# EAGLE board Thermistor-Connector-panel10x6 (EAGLE 6.6.0)
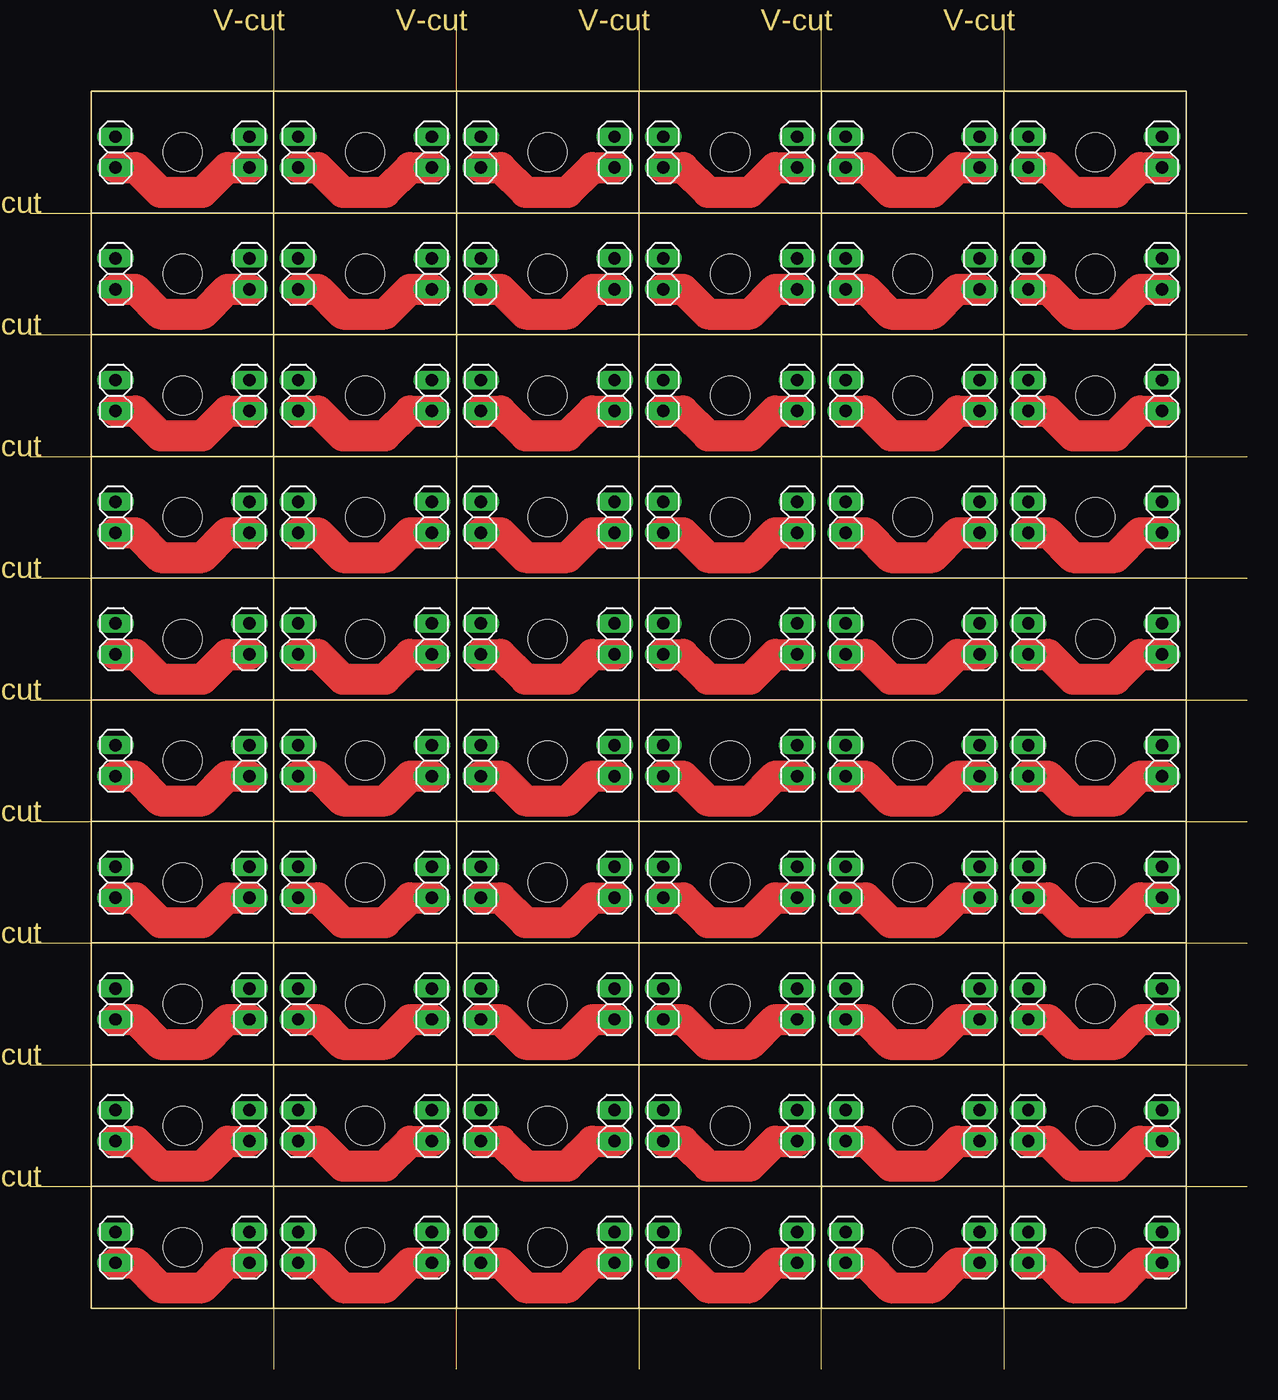
[diagram p0: board, top side]
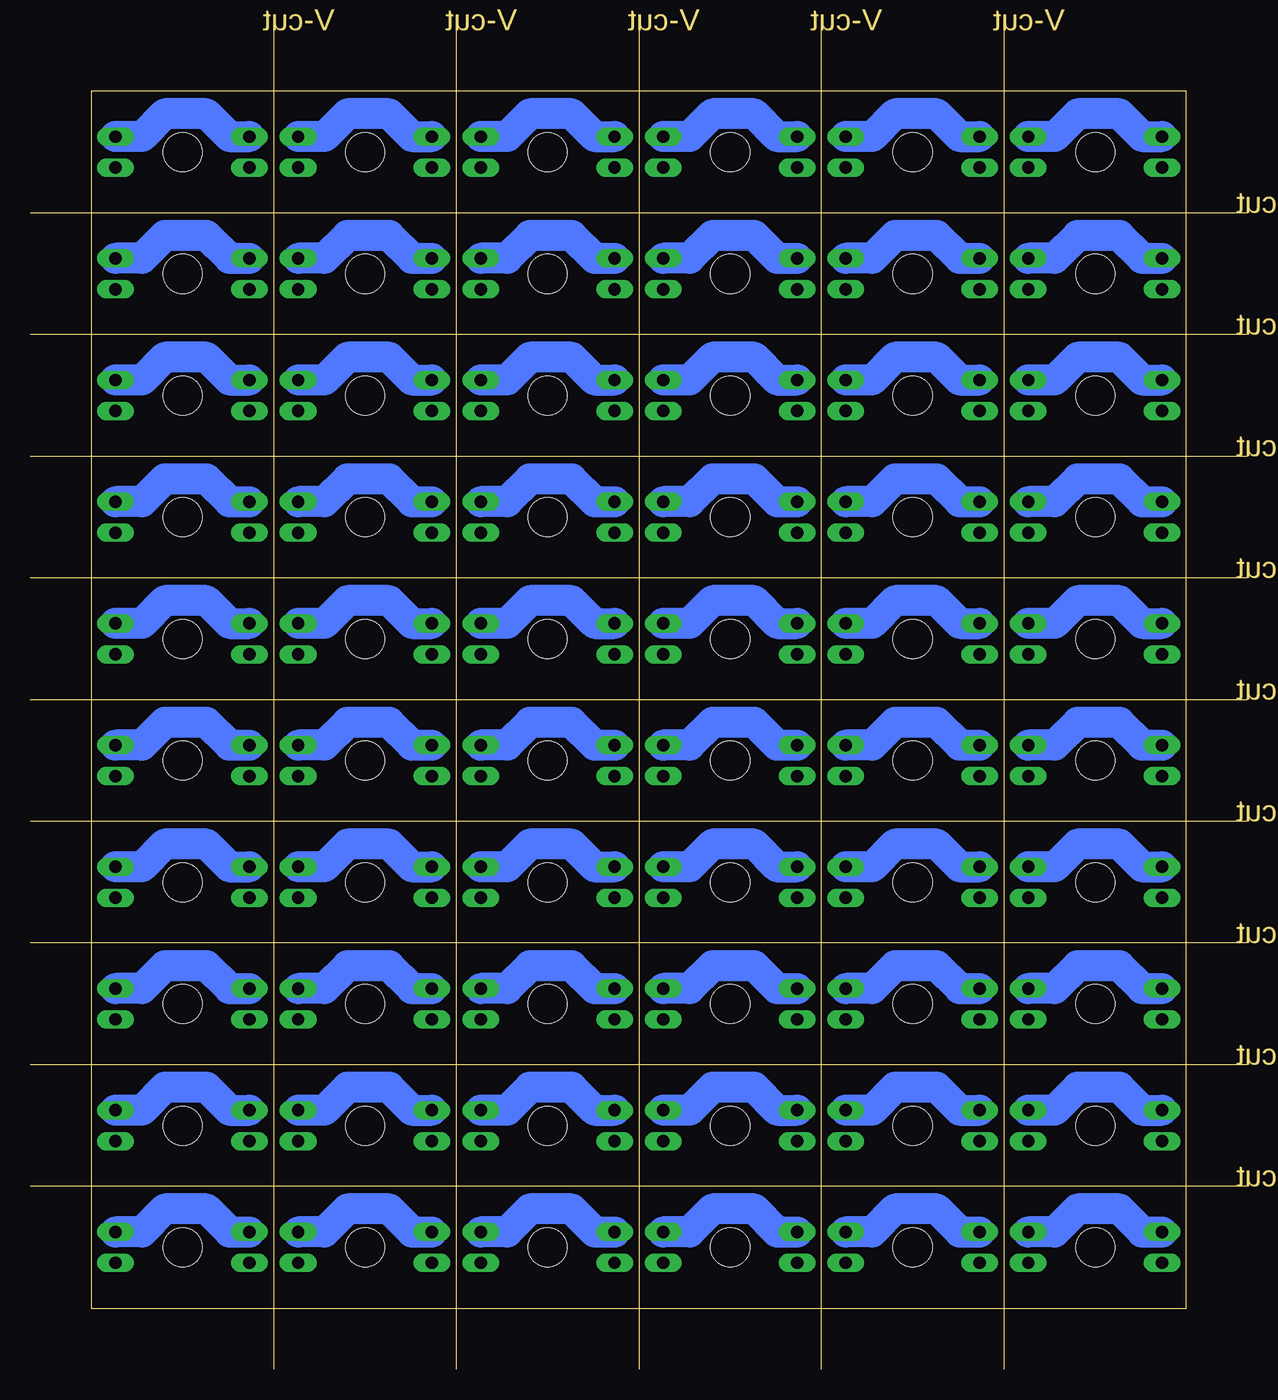
[diagram p1: board, bottom side, seen from below]

Size 100 x 110 mm. Coordinates in mm from the lower left corner, seen from the top.
Outline: 20,110 20,0
Outline: 35,0 35,110
Outline: 50,110 50,0
Outline: 65,0 65,110
Outline: 80,110 80,0
Outline: 0,15 100,15
Outline: 0,25 100,25
Outline: 0,35 100,35
Outline: 0,45 100,45
Outline: 0,55 100,55
Outline: 0,65 100,65
Outline: 0,75 100,75
Outline: 0,85 100,85
Outline: 0,95 100,95
Outline: 5,105 95,105 95,5 5,5 5,105
Copper layers (1*16): Top 0.035mm / dielectric 1.5mm / Bottom 0.035mm
Design rules "SeeedStudio_2layer_DRU_no_angle_20140221": minimum track width 6mil, minimum drill 12mil, track to track 6mil, track to pad 6mil, pad to pad 6mil, via to via 6mil, smd to smd 0mil, copper to edge 10mil, drill to drill 10mil, minimum pad ring 10mil, minimum via ring 6mil, stop-mask expansion 2mil, vias tented up to drill 100mil, thermal gap 10mil
Holes 3.2 mm at 12.5,10 12.5,20 12.5,30 12.5,40 12.5,50 12.5,60 12.5,70 12.5,80 12.5,90 12.5,100 27.5,10 27.5,20 27.5,30 27.5,40 27.5,50 27.5,70 27.5,60 27.5,80 27.5,90 27.5,100 42.5,100 57.5,100 72.5,100 87.5,100 87.5,90 72.5,90 57.5,90 42.5,90 42.5,80 57.5,80 72.5,80 87.5,80 87.5,70 72.5,70 57.5,70 42.5,70 42.5,60 57.5,60 72.5,60 87.5,60 87.5,50 72.5,50 57.5,50 42.5,50 42.5,40 57.5,40 72.5,40 87.5,40 87.5,30 72.5,30 57.5,30 42.5,30 42.5,20 57.5,20 72.5,20 87.5,20 87.5,10 72.5,10 57.5,10 42.5,10
tKeepout: area 10,7.5 to 15,12.5; area 10,17.5 to 15,22.5; area 10,27.5 to 15,32.5; area 10,37.5 to 15,42.5; area 10,47.5 to 15,52.5; area 10,57.5 to 15,62.5; area 10,67.5 to 15,72.5; area 10,77.5 to 15,82.5; area 10,87.5 to 15,92.5; area 10,97.5 to 15,102.5; area 25,7.5 to 30,12.5; area 25,17.5 to 30,22.5; 48 more areas

## Footprints (pad centres in the part's own frame; a part is rotated, then mirrored left to right if it is on the bottom)
1X02 = drill 1.016 long: 1 -1.27,0; 2 1.27,0

## Placement (x,y rotation side)
JP1  [1X02]  18,10 90 top
JP2  [1X02]  7,10 90 top
JP3  [1X02]  18,20 90 top
JP4  [1X02]  7,20 90 top
JP5  [1X02]  18,30 90 top
JP6  [1X02]  7,30 90 top
JP7  [1X02]  18,40 90 top
JP8  [1X02]  7,40 90 top
JP9  [1X02]  18,50 90 top
JP10  [1X02]  7,50 90 top
JP11  [1X02]  18,60 90 top
JP12  [1X02]  7,60 90 top
JP13  [1X02]  18,70 90 top
JP14  [1X02]  7,70 90 top
JP15  [1X02]  18,80 90 top
JP16  [1X02]  7,80 90 top
JP17  [1X02]  18,90 90 top
JP18  [1X02]  7,90 90 top
JP19  [1X02]  18,100 90 top
JP20  [1X02]  7,100 90 top
JP21  [1X02]  33,10 90 top
JP22  [1X02]  22,10 90 top
JP23  [1X02]  33,20 90 top
JP24  [1X02]  22,20 90 top
JP25  [1X02]  33,30 90 top
JP26  [1X02]  22,30 90 top
JP27  [1X02]  33,40 90 top
JP28  [1X02]  22,40 90 top
JP29  [1X02]  33,50 90 top
JP30  [1X02]  22,50 90 top
JP31  [1X02]  33,60 90 top
JP32  [1X02]  22,60 90 top
JP33  [1X02]  33,70 90 top
JP34  [1X02]  22,70 90 top
JP35  [1X02]  33,80 90 top
JP36  [1X02]  22,80 90 top
JP37  [1X02]  33,90 90 top
JP38  [1X02]  22,90 90 top
JP39  [1X02]  33,100 90 top
JP40  [1X02]  22,100 90 top
JP41  [1X02]  48,10 90 top
JP42  [1X02]  37,10 90 top
JP43  [1X02]  48,20 90 top
JP44  [1X02]  37,20 90 top
JP45  [1X02]  48,30 90 top
JP46  [1X02]  37,30 90 top
JP47  [1X02]  48,40 90 top
JP48  [1X02]  37,40 90 top
JP49  [1X02]  48,50 90 top
JP50  [1X02]  37,50 90 top
JP51  [1X02]  48,60 90 top
JP52  [1X02]  37,60 90 top
JP53  [1X02]  48,70 90 top
JP54  [1X02]  37,70 90 top
JP55  [1X02]  48,80 90 top
JP56  [1X02]  37,80 90 top
JP57  [1X02]  48,90 90 top
JP58  [1X02]  37,90 90 top
JP59  [1X02]  48,100 90 top
JP60  [1X02]  37,100 90 top
JP61  [1X02]  63,10 90 top
JP62  [1X02]  52,10 90 top
JP63  [1X02]  63,20 90 top
JP64  [1X02]  52,20 90 top
JP65  [1X02]  63,30 90 top
JP66  [1X02]  52,30 90 top
JP67  [1X02]  63,40 90 top
JP68  [1X02]  52,40 90 top
JP69  [1X02]  63,50 90 top
JP70  [1X02]  52,50 90 top
JP71  [1X02]  63,60 90 top
JP72  [1X02]  52,60 90 top
JP73  [1X02]  63,70 90 top
JP74  [1X02]  52,70 90 top
JP75  [1X02]  63,80 90 top
JP76  [1X02]  52,80 90 top
JP77  [1X02]  63,90 90 top
JP78  [1X02]  52,90 90 top
JP79  [1X02]  63,100 90 top
JP80  [1X02]  52,100 90 top
JP81  [1X02]  78,10 90 top
JP82  [1X02]  67,10 90 top
JP83  [1X02]  78,20 90 top
JP84  [1X02]  67,20 90 top
JP85  [1X02]  78,30 90 top
JP86  [1X02]  67,30 90 top
JP87  [1X02]  78,40 90 top
JP88  [1X02]  67,40 90 top
JP89  [1X02]  78,50 90 top
JP90  [1X02]  67,50 90 top
JP91  [1X02]  78,60 90 top
JP92  [1X02]  67,60 90 top
JP93  [1X02]  78,70 90 top
JP94  [1X02]  67,70 90 top
JP95  [1X02]  78,80 90 top
JP96  [1X02]  67,80 90 top
JP97  [1X02]  78,90 90 top
JP98  [1X02]  67,90 90 top
JP99  [1X02]  78,100 90 top
JP100  [1X02]  67,100 90 top
JP101  [1X02]  93,10 90 top
JP102  [1X02]  82,10 90 top
JP103  [1X02]  93,20 90 top
JP104  [1X02]  82,20 90 top
JP105  [1X02]  93,30 90 top
JP106  [1X02]  82,30 90 top
JP107  [1X02]  93,40 90 top
JP108  [1X02]  82,40 90 top
JP109  [1X02]  93,50 90 top
JP110  [1X02]  82,50 90 top
JP111  [1X02]  93,60 90 top
JP112  [1X02]  82,60 90 top
JP113  [1X02]  93,70 90 top
JP114  [1X02]  82,70 90 top
JP115  [1X02]  93,80 90 top
JP116  [1X02]  82,80 90 top
JP117  [1X02]  93,90 90 top
JP118  [1X02]  82,90 90 top
JP119  [1X02]  93,100 90 top
JP120  [1X02]  82,100 90 top

## Library data of the parts
JP1-JP120 = pinhead

## Nets
N$1: JP1.1 JP2.1
N$2: JP1.2 JP2.2
N$3: JP3.1 JP4.1
N$4: JP3.2 JP4.2
N$5: JP5.1 JP6.1
N$6: JP5.2 JP6.2
N$7: JP7.1 JP8.1
N$8: JP7.2 JP8.2
N$9: JP9.1 JP10.1
N$10: JP9.2 JP10.2
N$11: JP11.1 JP12.1
N$12: JP11.2 JP12.2
N$13: JP13.1 JP14.1
N$14: JP13.2 JP14.2
N$15: JP15.1 JP16.1
N$16: JP15.2 JP16.2
N$17: JP17.1 JP18.1
N$18: JP17.2 JP18.2
N$19: JP19.1 JP20.1
N$20: JP19.2 JP20.2
N$21: JP21.1 JP22.1
N$22: JP21.2 JP22.2
N$23: JP23.1 JP24.1
N$24: JP23.2 JP24.2
N$25: JP25.1 JP26.1
N$26: JP25.2 JP26.2
N$27: JP27.1 JP28.1
N$28: JP27.2 JP28.2
N$29: JP29.1 JP30.1
N$30: JP29.2 JP30.2
N$31: JP31.1 JP32.1
N$32: JP31.2 JP32.2
N$33: JP33.1 JP34.1
N$34: JP33.2 JP34.2
N$35: JP35.1 JP36.1
N$36: JP35.2 JP36.2
N$37: JP37.1 JP38.1
N$38: JP37.2 JP38.2
N$39: JP39.1 JP40.1
N$40: JP39.2 JP40.2
N$41: JP41.1 JP42.1
N$42: JP41.2 JP42.2
N$43: JP43.1 JP44.1
N$44: JP43.2 JP44.2
N$45: JP45.1 JP46.1
N$46: JP45.2 JP46.2
N$47: JP47.1 JP48.1
N$48: JP47.2 JP48.2
N$49: JP49.1 JP50.1
N$50: JP49.2 JP50.2
N$51: JP51.1 JP52.1
N$52: JP51.2 JP52.2
N$53: JP53.1 JP54.1
N$54: JP53.2 JP54.2
N$55: JP55.1 JP56.1
N$56: JP55.2 JP56.2
N$57: JP57.1 JP58.1
N$58: JP57.2 JP58.2
N$59: JP59.1 JP60.1
N$60: JP59.2 JP60.2
N$61: JP61.1 JP62.1
N$62: JP61.2 JP62.2
N$63: JP63.1 JP64.1
N$64: JP63.2 JP64.2
N$65: JP65.1 JP66.1
N$66: JP65.2 JP66.2
N$67: JP67.1 JP68.1
N$68: JP67.2 JP68.2
N$69: JP69.1 JP70.1
N$70: JP69.2 JP70.2
N$71: JP71.1 JP72.1
N$72: JP71.2 JP72.2
N$73: JP73.1 JP74.1
N$74: JP73.2 JP74.2
N$75: JP75.1 JP76.1
N$76: JP75.2 JP76.2
N$77: JP77.1 JP78.1
N$78: JP77.2 JP78.2
N$79: JP79.1 JP80.1
N$80: JP79.2 JP80.2
N$81: JP81.1 JP82.1
N$82: JP81.2 JP82.2
N$83: JP83.1 JP84.1
N$84: JP83.2 JP84.2
N$85: JP85.1 JP86.1
N$86: JP85.2 JP86.2
N$87: JP87.1 JP88.1
N$88: JP87.2 JP88.2
N$89: JP89.1 JP90.1
N$90: JP89.2 JP90.2
N$91: JP91.1 JP92.1
N$92: JP91.2 JP92.2
N$93: JP93.1 JP94.1
N$94: JP93.2 JP94.2
N$95: JP95.1 JP96.1
N$96: JP95.2 JP96.2
N$97: JP97.1 JP98.1
N$98: JP97.2 JP98.2
N$99: JP99.1 JP100.1
N$100: JP99.2 JP100.2
N$101: JP101.1 JP102.1
N$102: JP101.2 JP102.2
N$103: JP103.1 JP104.1
N$104: JP103.2 JP104.2
N$105: JP105.1 JP106.1
N$106: JP105.2 JP106.2
N$107: JP107.1 JP108.1
N$108: JP107.2 JP108.2
N$109: JP109.1 JP110.1
N$110: JP109.2 JP110.2
N$111: JP111.1 JP112.1
N$112: JP111.2 JP112.2
N$113: JP113.1 JP114.1
N$114: JP113.2 JP114.2
N$115: JP115.1 JP116.1
N$116: JP115.2 JP116.2
N$117: JP117.1 JP118.1
N$118: JP117.2 JP118.2
N$119: JP119.1 JP120.1
N$120: JP119.2 JP120.2

## Tracks (layer width: path | path; a pad name or v marks a point on that pad's centre or on a via)
N$1
  Top 2.54: JP2.1 8.64,8.73 10.67,6.7 14.15,6.7 16.18,8.73 JP1.1
N$2
  Bottom 2.54: JP2.2 8.64,11.27 10.52,13.15 13.95,13.15 15.83,11.27 JP1.2
N$3
  Top 2.54: JP4.1 8.64,18.73 10.67,16.7 14.15,16.7 16.18,18.73 JP3.1
N$4
  Bottom 2.54: JP4.2 8.64,21.27 10.52,23.15 13.95,23.15 15.83,21.27 JP3.2
N$5
  Top 2.54: JP6.1 8.64,28.73 10.67,26.7 14.15,26.7 16.18,28.73 JP5.1
N$6
  Bottom 2.54: JP6.2 8.64,31.27 10.52,33.15 13.95,33.15 15.83,31.27 JP5.2
N$7
  Top 2.54: JP8.1 8.64,38.73 10.67,36.7 14.15,36.7 16.18,38.73 JP7.1
N$8
  Bottom 2.54: JP8.2 8.64,41.27 10.52,43.15 13.95,43.15 15.83,41.27 JP7.2
N$9
  Top 2.54: JP10.1 8.64,48.73 10.67,46.7 14.15,46.7 16.18,48.73 JP9.1
N$10
  Bottom 2.54: JP10.2 8.64,51.27 10.52,53.15 13.95,53.15 15.83,51.27 JP9.2
N$11
  Top 2.54: JP12.1 8.64,58.73 10.67,56.7 14.15,56.7 16.18,58.73 JP11.1
N$12
  Bottom 2.54: JP12.2 8.64,61.27 10.52,63.15 13.95,63.15 15.83,61.27 JP11.2
N$13
  Top 2.54: JP14.1 8.64,68.73 10.67,66.7 14.15,66.7 16.18,68.73 JP13.1
N$14
  Bottom 2.54: JP14.2 8.64,71.27 10.52,73.15 13.95,73.15 15.83,71.27 JP13.2
N$15
  Top 2.54: JP16.1 8.64,78.73 10.67,76.7 14.15,76.7 16.18,78.73 JP15.1
N$16
  Bottom 2.54: JP16.2 8.64,81.27 10.52,83.15 13.95,83.15 15.83,81.27 JP15.2
N$17
  Top 2.54: JP18.1 8.64,88.73 10.67,86.7 14.15,86.7 16.18,88.73 JP17.1
N$18
  Bottom 2.54: JP18.2 8.64,91.27 10.52,93.15 13.95,93.15 15.83,91.27 JP17.2
N$19
  Top 2.54: JP20.1 8.64,98.73 10.67,96.7 14.15,96.7 16.18,98.73 JP19.1
N$20
  Bottom 2.54: JP20.2 8.64,101.27 10.52,103.15 13.95,103.15 15.83,101.27 JP19.2
N$21
  Top 2.54: JP22.1 23.64,8.73 25.67,6.7 29.15,6.7 31.18,8.73 JP21.1
N$22
  Bottom 2.54: JP22.2 23.64,11.27 25.52,13.15 28.95,13.15 30.83,11.27 JP21.2
N$23
  Top 2.54: JP24.1 23.64,18.73 25.67,16.7 29.15,16.7 31.18,18.73 JP23.1
N$24
  Bottom 2.54: JP24.2 23.64,21.27 25.52,23.15 28.95,23.15 30.83,21.27 JP23.2
N$25
  Top 2.54: JP26.1 23.64,28.73 25.67,26.7 29.15,26.7 31.18,28.73 JP25.1
N$26
  Bottom 2.54: JP26.2 23.64,31.27 25.52,33.15 28.95,33.15 30.83,31.27 JP25.2
N$27
  Top 2.54: JP28.1 23.64,38.73 25.67,36.7 29.15,36.7 31.18,38.73 JP27.1
N$28
  Bottom 2.54: JP28.2 23.64,41.27 25.52,43.15 28.95,43.15 30.83,41.27 JP27.2
N$29
  Top 2.54: JP30.1 23.64,48.73 25.67,46.7 29.15,46.7 31.18,48.73 JP29.1
N$30
  Bottom 2.54: JP30.2 23.64,51.27 25.52,53.15 28.95,53.15 30.83,51.27 JP29.2
N$31
  Top 2.54: JP32.1 23.64,58.73 25.67,56.7 29.15,56.7 31.18,58.73 JP31.1
N$32
  Bottom 2.54: JP32.2 23.64,61.27 25.52,63.15 28.95,63.15 30.83,61.27 JP31.2
N$33
  Top 2.54: JP34.1 23.64,68.73 25.67,66.7 29.15,66.7 31.18,68.73 JP33.1
N$34
  Bottom 2.54: JP34.2 23.64,71.27 25.52,73.15 28.95,73.15 30.83,71.27 JP33.2
N$35
  Top 2.54: JP36.1 23.64,78.73 25.67,76.7 29.15,76.7 31.18,78.73 JP35.1
N$36
  Bottom 2.54: JP36.2 23.64,81.27 25.52,83.15 28.95,83.15 30.83,81.27 JP35.2
N$37
  Top 2.54: JP38.1 23.64,88.73 25.67,86.7 29.15,86.7 31.18,88.73 JP37.1
N$38
  Bottom 2.54: JP38.2 23.64,91.27 25.52,93.15 28.95,93.15 30.83,91.27 JP37.2
N$39
  Top 2.54: JP40.1 23.64,98.73 25.67,96.7 29.15,96.7 31.18,98.73 JP39.1
N$40
  Bottom 2.54: JP40.2 23.64,101.27 25.52,103.15 28.95,103.15 30.83,101.27 JP39.2
N$41
  Top 2.54: JP42.1 38.64,8.73 40.67,6.7 44.15,6.7 46.18,8.73 JP41.1
N$42
  Bottom 2.54: JP42.2 38.64,11.27 40.52,13.15 43.95,13.15 45.83,11.27 JP41.2
N$43
  Top 2.54: JP44.1 38.64,18.73 40.67,16.7 44.15,16.7 46.18,18.73 JP43.1
N$44
  Bottom 2.54: JP44.2 38.64,21.27 40.52,23.15 43.95,23.15 45.83,21.27 JP43.2
N$45
  Top 2.54: JP46.1 38.64,28.73 40.67,26.7 44.15,26.7 46.18,28.73 JP45.1
N$46
  Bottom 2.54: JP46.2 38.64,31.27 40.52,33.15 43.95,33.15 45.83,31.27 JP45.2
N$47
  Top 2.54: JP48.1 38.64,38.73 40.67,36.7 44.15,36.7 46.18,38.73 JP47.1
N$48
  Bottom 2.54: JP48.2 38.64,41.27 40.52,43.15 43.95,43.15 45.83,41.27 JP47.2
N$49
  Top 2.54: JP50.1 38.64,48.73 40.67,46.7 44.15,46.7 46.18,48.73 JP49.1
N$50
  Bottom 2.54: JP50.2 38.64,51.27 40.52,53.15 43.95,53.15 45.83,51.27 JP49.2
N$51
  Top 2.54: JP52.1 38.64,58.73 40.67,56.7 44.15,56.7 46.18,58.73 JP51.1
N$52
  Bottom 2.54: JP52.2 38.64,61.27 40.52,63.15 43.95,63.15 45.83,61.27 JP51.2
N$53
  Top 2.54: JP54.1 38.64,68.73 40.67,66.7 44.15,66.7 46.18,68.73 JP53.1
N$54
  Bottom 2.54: JP54.2 38.64,71.27 40.52,73.15 43.95,73.15 45.83,71.27 JP53.2
N$55
  Top 2.54: JP56.1 38.64,78.73 40.67,76.7 44.15,76.7 46.18,78.73 JP55.1
N$56
  Bottom 2.54: JP56.2 38.64,81.27 40.52,83.15 43.95,83.15 45.83,81.27 JP55.2
N$57
  Top 2.54: JP58.1 38.64,88.73 40.67,86.7 44.15,86.7 46.18,88.73 JP57.1
N$58
  Bottom 2.54: JP58.2 38.64,91.27 40.52,93.15 43.95,93.15 45.83,91.27 JP57.2
N$59
  Top 2.54: JP60.1 38.64,98.73 40.67,96.7 44.15,96.7 46.18,98.73 JP59.1
N$60
  Bottom 2.54: JP60.2 38.64,101.27 40.52,103.15 43.95,103.15 45.83,101.27 JP59.2
N$61
  Top 2.54: JP62.1 53.64,8.73 55.67,6.7 59.15,6.7 61.18,8.73 JP61.1
N$62
  Bottom 2.54: JP62.2 53.64,11.27 55.52,13.15 58.95,13.15 60.83,11.27 JP61.2
N$63
  Top 2.54: JP64.1 53.64,18.73 55.67,16.7 59.15,16.7 61.18,18.73 JP63.1
N$64
  Bottom 2.54: JP64.2 53.64,21.27 55.52,23.15 58.95,23.15 60.83,21.27 JP63.2
N$65
  Top 2.54: JP66.1 53.64,28.73 55.67,26.7 59.15,26.7 61.18,28.73 JP65.1
N$66
  Bottom 2.54: JP66.2 53.64,31.27 55.52,33.15 58.95,33.15 60.83,31.27 JP65.2
N$67
  Top 2.54: JP68.1 53.64,38.73 55.67,36.7 59.15,36.7 61.18,38.73 JP67.1
N$68
  Bottom 2.54: JP68.2 53.64,41.27 55.52,43.15 58.95,43.15 60.83,41.27 JP67.2
N$69
  Top 2.54: JP70.1 53.64,48.73 55.67,46.7 59.15,46.7 61.18,48.73 JP69.1
N$70
  Bottom 2.54: JP70.2 53.64,51.27 55.52,53.15 58.95,53.15 60.83,51.27 JP69.2
N$71
  Top 2.54: JP72.1 53.64,58.73 55.67,56.7 59.15,56.7 61.18,58.73 JP71.1
N$72
  Bottom 2.54: JP72.2 53.64,61.27 55.52,63.15 58.95,63.15 60.83,61.27 JP71.2
N$73
  Top 2.54: JP74.1 53.64,68.73 55.67,66.7 59.15,66.7 61.18,68.73 JP73.1
N$74
  Bottom 2.54: JP74.2 53.64,71.27 55.52,73.15 58.95,73.15 60.83,71.27 JP73.2
N$75
  Top 2.54: JP76.1 53.64,78.73 55.67,76.7 59.15,76.7 61.18,78.73 JP75.1
N$76
  Bottom 2.54: JP76.2 53.64,81.27 55.52,83.15 58.95,83.15 60.83,81.27 JP75.2
N$77
  Top 2.54: JP78.1 53.64,88.73 55.67,86.7 59.15,86.7 61.18,88.73 JP77.1
N$78
  Bottom 2.54: JP78.2 53.64,91.27 55.52,93.15 58.95,93.15 60.83,91.27 JP77.2
N$79
  Top 2.54: JP80.1 53.64,98.73 55.67,96.7 59.15,96.7 61.18,98.73 JP79.1
N$80
  Bottom 2.54: JP80.2 53.64,101.27 55.52,103.15 58.95,103.15 60.83,101.27 JP79.2
N$81
  Top 2.54: JP82.1 68.64,8.73 70.67,6.7 74.15,6.7 76.18,8.73 JP81.1
N$82
  Bottom 2.54: JP82.2 68.64,11.27 70.52,13.15 73.95,13.15 75.83,11.27 JP81.2
N$83
  Top 2.54: JP84.1 68.64,18.73 70.67,16.7 74.15,16.7 76.18,18.73 JP83.1
N$84
  Bottom 2.54: JP84.2 68.64,21.27 70.52,23.15 73.95,23.15 75.83,21.27 JP83.2
N$85
  Top 2.54: JP86.1 68.64,28.73 70.67,26.7 74.15,26.7 76.18,28.73 JP85.1
N$86
  Bottom 2.54: JP86.2 68.64,31.27 70.52,33.15 73.95,33.15 75.83,31.27 JP85.2
N$87
  Top 2.54: JP88.1 68.64,38.73 70.67,36.7 74.15,36.7 76.18,38.73 JP87.1
N$88
  Bottom 2.54: JP88.2 68.64,41.27 70.52,43.15 73.95,43.15 75.83,41.27 JP87.2
N$89
  Top 2.54: JP90.1 68.64,48.73 70.67,46.7 74.15,46.7 76.18,48.73 JP89.1
N$90
  Bottom 2.54: JP90.2 68.64,51.27 70.52,53.15 73.95,53.15 75.83,51.27 JP89.2
N$91
  Top 2.54: JP92.1 68.64,58.73 70.67,56.7 74.15,56.7 76.18,58.73 JP91.1
N$92
  Bottom 2.54: JP92.2 68.64,61.27 70.52,63.15 73.95,63.15 75.83,61.27 JP91.2
N$93
  Top 2.54: JP94.1 68.64,68.73 70.67,66.7 74.15,66.7 76.18,68.73 JP93.1
N$94
  Bottom 2.54: JP94.2 68.64,71.27 70.52,73.15 73.95,73.15 75.83,71.27 JP93.2
N$95
  Top 2.54: JP96.1 68.64,78.73 70.67,76.7 74.15,76.7 76.18,78.73 JP95.1
N$96
  Bottom 2.54: JP96.2 68.64,81.27 70.52,83.15 73.95,83.15 75.83,81.27 JP95.2
N$97
  Top 2.54: JP98.1 68.64,88.73 70.67,86.7 74.15,86.7 76.18,88.73 JP97.1
N$98
  Bottom 2.54: JP98.2 68.64,91.27 70.52,93.15 73.95,93.15 75.83,91.27 JP97.2
N$99
  Top 2.54: JP100.1 68.64,98.73 70.67,96.7 74.15,96.7 76.18,98.73 JP99.1
N$100
  Bottom 2.54: JP100.2 68.64,101.27 70.52,103.15 73.95,103.15 75.83,101.27 JP99.2
N$101
  Top 2.54: JP102.1 83.64,8.73 85.67,6.7 89.15,6.7 91.18,8.73 JP101.1
N$102
  Bottom 2.54: JP102.2 83.64,11.27 85.52,13.15 88.95,13.15 90.83,11.27 JP101.2
N$103
  Top 2.54: JP104.1 83.64,18.73 85.67,16.7 89.15,16.7 91.18,18.73 JP103.1
N$104
  Bottom 2.54: JP104.2 83.64,21.27 85.52,23.15 88.95,23.15 90.83,21.27 JP103.2
N$105
  Top 2.54: JP106.1 83.64,28.73 85.67,26.7 89.15,26.7 91.18,28.73 JP105.1
N$106
  Bottom 2.54: JP106.2 83.64,31.27 85.52,33.15 88.95,33.15 90.83,31.27 JP105.2
N$107
  Top 2.54: JP108.1 83.64,38.73 85.67,36.7 89.15,36.7 91.18,38.73 JP107.1
N$108
  Bottom 2.54: JP108.2 83.64,41.27 85.52,43.15 88.95,43.15 90.83,41.27 JP107.2
N$109
  Top 2.54: JP110.1 83.64,48.73 85.67,46.7 89.15,46.7 91.18,48.73 JP109.1
N$110
  Bottom 2.54: JP110.2 83.64,51.27 85.52,53.15 88.95,53.15 90.83,51.27 JP109.2
N$111
  Top 2.54: JP112.1 83.64,58.73 85.67,56.7 89.15,56.7 91.18,58.73 JP111.1
N$112
  Bottom 2.54: JP112.2 83.64,61.27 85.52,63.15 88.95,63.15 90.83,61.27 JP111.2
N$113
  Top 2.54: JP114.1 83.64,68.73 85.67,66.7 89.15,66.7 91.18,68.73 JP113.1
N$114
  Bottom 2.54: JP114.2 83.64,71.27 85.52,73.15 88.95,73.15 90.83,71.27 JP113.2
N$115
  Top 2.54: JP116.1 83.64,78.73 85.67,76.7 89.15,76.7 91.18,78.73 JP115.1
N$116
  Bottom 2.54: JP116.2 83.64,81.27 85.52,83.15 88.95,83.15 90.83,81.27 JP115.2
N$117
  Top 2.54: JP118.1 83.64,88.73 85.67,86.7 89.15,86.7 91.18,88.73 JP117.1
N$118
  Bottom 2.54: JP118.2 83.64,91.27 85.52,93.15 88.95,93.15 90.83,91.27 JP117.2
N$119
  Top 2.54: JP120.1 83.64,98.73 85.67,96.7 89.15,96.7 91.18,98.73 JP119.1
N$120
  Bottom 2.54: JP120.2 83.64,101.27 85.52,103.15 88.95,103.15 90.83,101.27 JP119.2

## Text on the board
Dimension: V-cut | V-cut | V-cut | V-cut | V-cut | V-cut | V-cut | V-cut | V-cut | V-cut | V-cut | V-cut | V-cut | V-cut